# Altium PCB PCB_2020-12-12_22-15-00_2021-06-10.pcbdoc
Units mm, origin at the board's own origin, x right, y up, seen from the top; angles counter-clockwise.
Board outline 79.76 x 77.85 mm, 2 copper layers (Top Layer, Bottom Layer); 79 components, 46 nets, 216 pads, 113 vias.
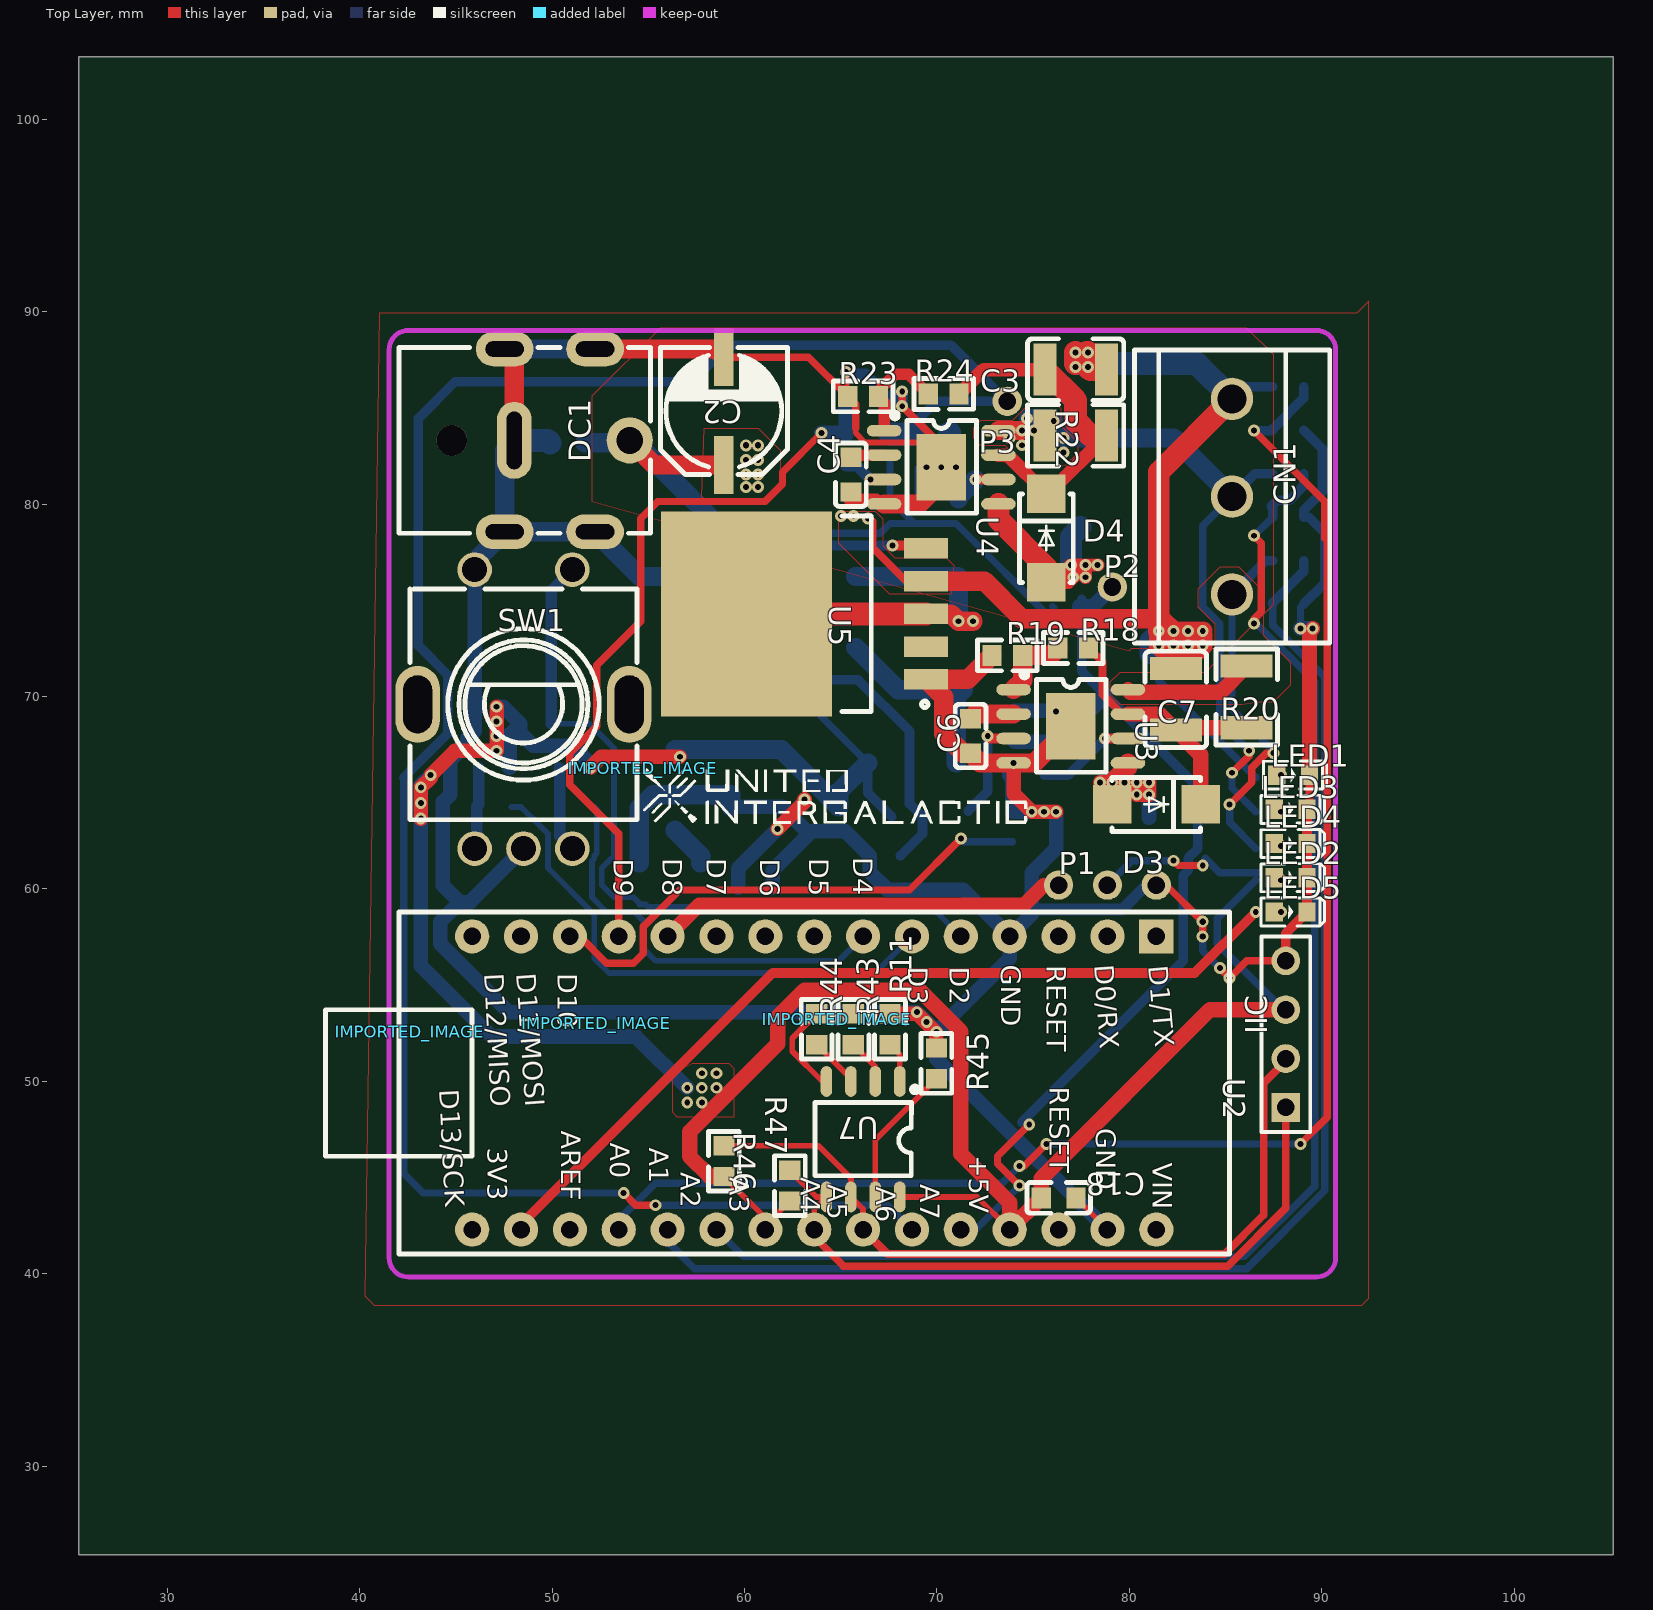
[diagram p0: Top Layer view]
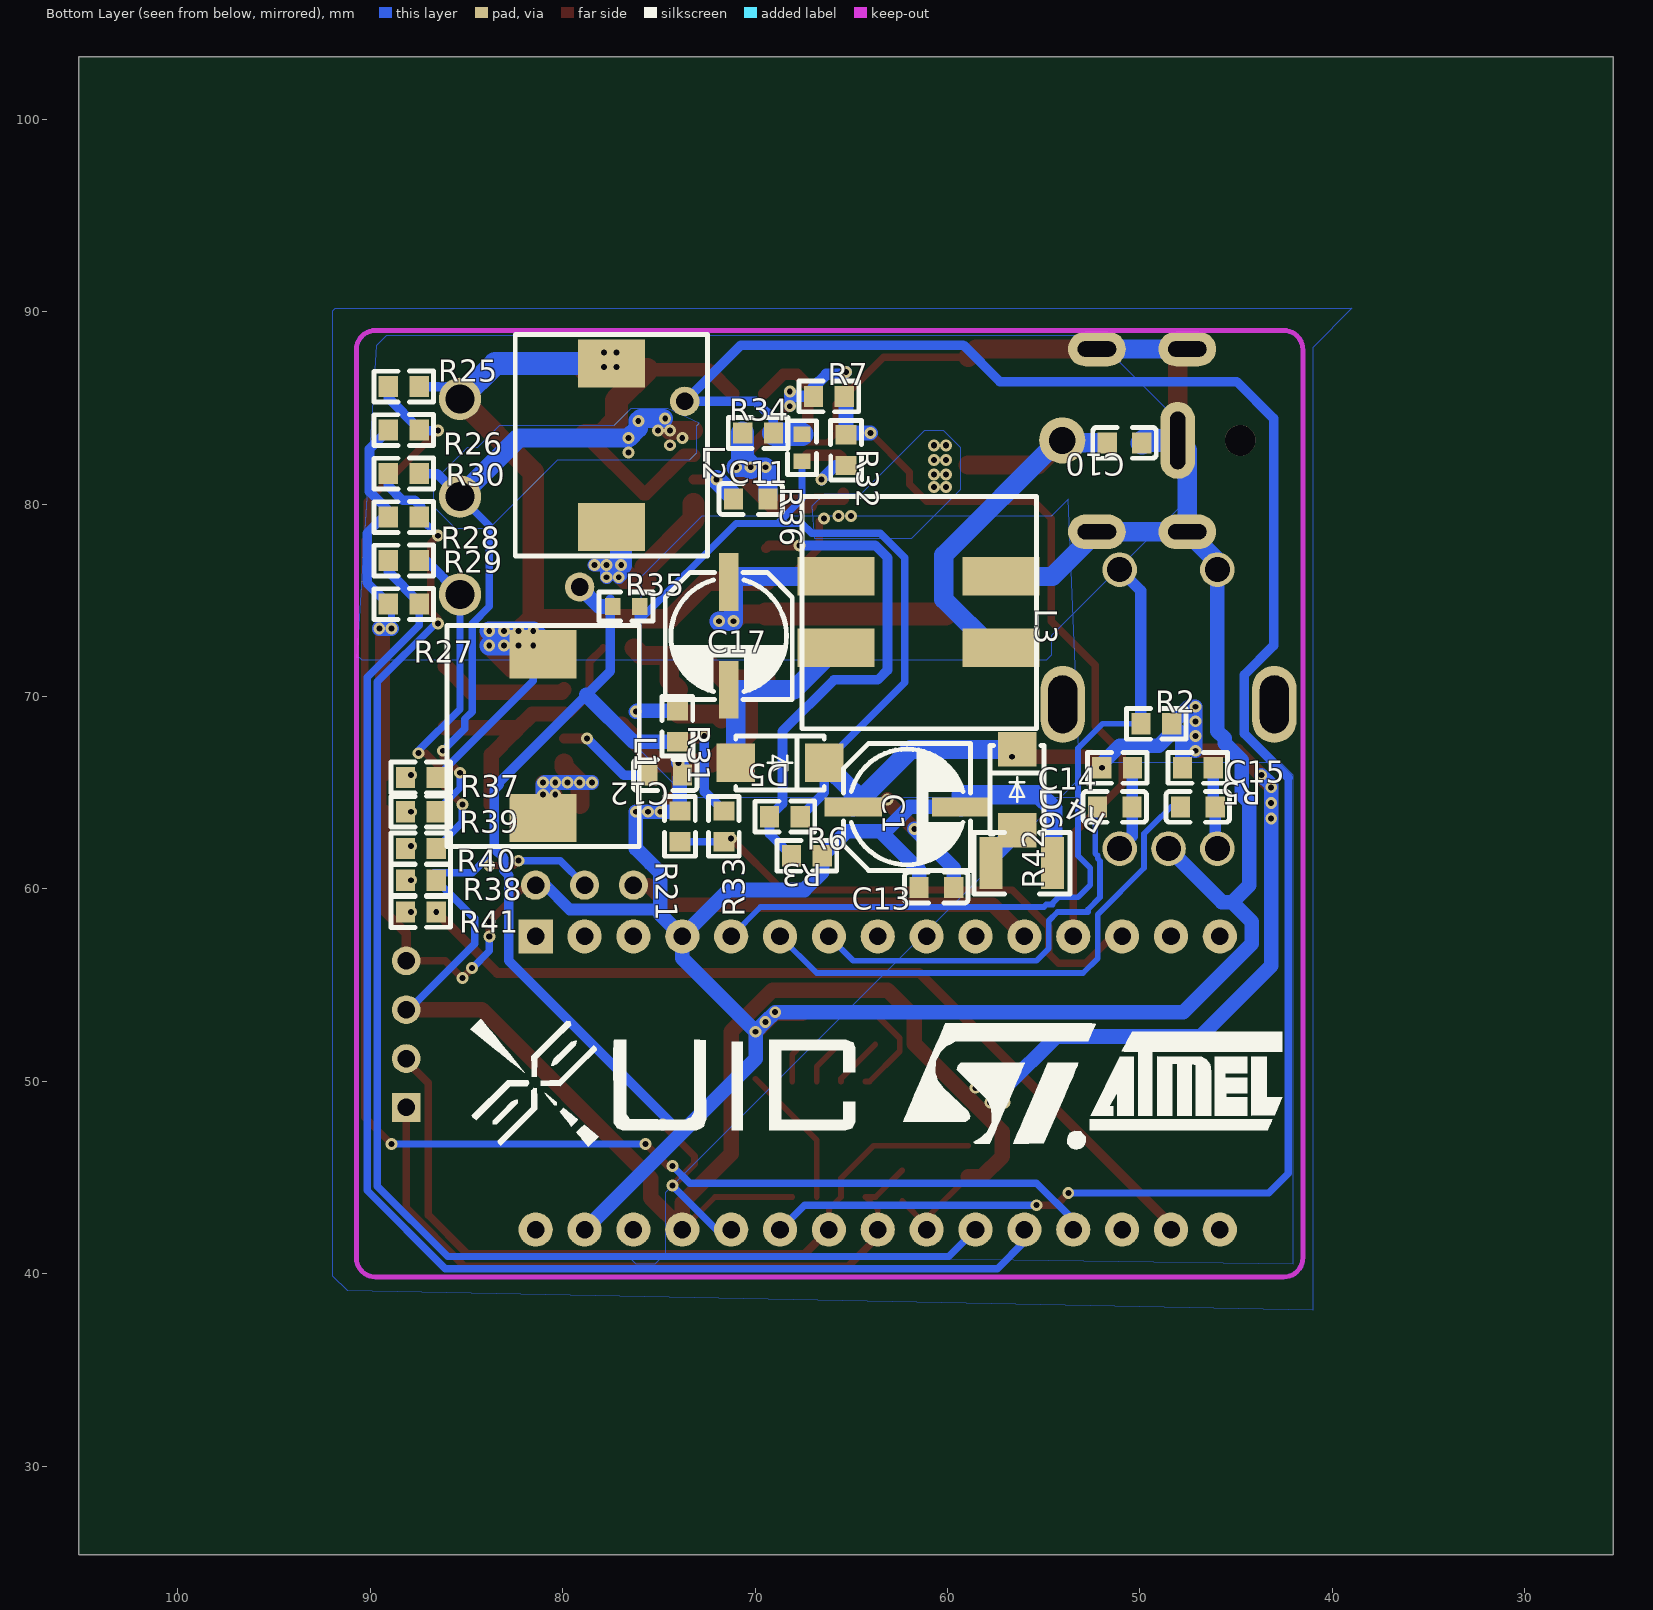
[diagram p1: Bottom Layer view, seen from below]

## Layer stack, top to bottom
Top Layer: signal copper (thickness not stored)
Dielectric: dielectric 0.32, FR-4, Dk 4.8
Bottom Layer: signal copper (thickness not stored)

## Board outline
105.156,25.4 25.4,25.4 25.4,103.251 105.156,103.251

## Components (designator, comment, footprint, x,y, rotation, side; value= is the part's Value field where it differs from the comment)
C1 "220uF" CAP-SMD_BD6.3-L6.6-W6.6-FD#1 62.103,64.262 r0 bottom
C2 "220uF" CAP-SMD_BD6.3-L6.6-W6.6-FD#2 58.928,84.836 r90 top
C3 "1uF" C1210 77.216,86.995 r0 top
C4 "1nF" C0603#1 65.532,81.534 r90 top
C6 "1nF" C0603#1 71.755,67.945 r90 top
C7 "1uF" C1210 82.423,69.85 r90 top
C10 "1uF" C0603#2 50.8,83.185 r180 bottom
C11 "1uF" C0603#2 70.231,80.264 r180 bottom
C12 "1uF" C0603#2 74.676,65.913 r180 bottom
C13 "1uF" C0603#2 60.579,60.071 r0 bottom
C14 "0.01uF" C0603#2 51.308,64.262 r0 bottom
C15 "0.01uF" C0603#2 46.99,64.262 r0 bottom
C17 "22uF" CAP-SMD_BD6.3-L6.6-W6.6-FD#1 71.374,73.152 r90 bottom
C18 "0.1u" C0603#1 76.327,43.942 r180 top
CN1 "MKDSN1.5/3-5.08" CONN-TH_3P-P5.08_1729131 85.344,80.391 r90 top
D3 "肖特基" DO-214AC_L4.3-W2.7-LS5.3-RD#1 81.407,64.389 r180 top
D4 "肖特基" DO-214AC_L4.3-W2.7-LS5.3-RD#1 75.692,78.232 r270 top
D5 "SS34_C8678" DO-214AC_L4.3-W2.7-LS5.3-RD#2 68.707,66.548 r180 bottom
D6 "1SMA4733A_C362278" SMA_L4.4-W2.8-LS5.4-RD 56.388,65.151 r90 bottom
DC1 "DC007B" DC-007B 42.037,83.312 r90 top
IIC "4p焊盘" HDR1X4 88.138,52.451 r90 top
IMPORTED_IMAGE "IMPORTED_IMAGE" IMPORTED_IMAGE 54.701,66.265 r0 top
IMPORTED_IMAGE "IMPORTED_IMAGE" IMPORTED_IMAGE 42.597,52.562 r0 top
IMPORTED_IMAGE "IMPORTED_IMAGE" IMPORTED_IMAGE 52.307,53.02 r0 top
IMPORTED_IMAGE "IMPORTED_IMAGE" IMPORTED_IMAGE 64.808,53.237 r0 top
L1 "47uH" IND-SMD_L11.5-W10.0 81.026,67.945 r90 bottom
L2 "47uH" IND-SMD_L11.5-W10.0 77.47,83.058 r90 bottom
L3 "MSD1278" MSD1278 67.564,80.391 r90 bottom
LED1 "LED-0603_B" LED0603_BLUE 88.519,65.913 r0 top
LED2 "LED-0603_B" LED0603_BLUE 88.392,60.579 r0 top
LED3 "LED-0603_B" LED0603_BLUE 88.392,64.135 r0 top
LED4 "LED-0603_B" LED0603_BLUE 88.392,62.357 r0 top
LED5 "LED-0603_B" LED0603_BLUE 88.392,58.801 r0 top
P1 "1PIN" 1P 76.327,60.071 r0 top
P2 "1PIN" 1P 79.121,75.565 r0 top
P3 "1PIN" 1P 73.66,85.217 r0 top
R2 "10k" R0603#1 49.149,68.58 r0 bottom
R3 "11k" R0603#1 67.31,61.722 r180 bottom
R4 "10k" R0603#1 51.181,66.294 r180 bottom
R5 "10k" R0603#1 46.99,66.294 r180 bottom
R6 "33k" R0603#1 68.453,63.754 r0 bottom
R7 "10K" R0603#1 66.167,85.598 r0 bottom
R11 "4.7K" R0603#2 67.564,52.705 r270 top
R18 "30k" R0603#2 77.089,72.517 r0 top
R19 "1k" R0603#2 73.66,72.136 r0 top
R20 "0.68R" R1210#1 86.106,69.977 r90 top
R21 "10K" R0603#1 73.914,63.246 r90 bottom
R22 "0.68R" R1210#1 77.216,83.566 r180 top
R23 "1k" R0603#2 66.167,85.598 r0 top
R24 "30k" R0603#2 70.358,85.725 r0 top
R25 "18k" R0603#1 88.265,86.106 r0 bottom
R26 "2k" R0603#1 88.265,83.845 r0 bottom
R27 "2k" R0603#1 88.265,74.803 r0 bottom
R28 "2k" R0603#1 88.265,79.324 r0 bottom
R29 "18k" R0603#1 88.265,77.064 r0 bottom
R30 "18k" R0603#1 88.265,81.585 r0 bottom
R31 "100k" R0603#1 74.041,68.453 r90 bottom
R32 "100R" R0603#1 65.278,82.804 r90 bottom
R33 "100R" R0603#1 71.628,63.246 r270 bottom
R34 "100k" R0603#1 69.85,83.693 r0 bottom
R35 "100KΩ" R0603#3 76.708,74.676 r0 bottom
R36 "100KΩ" R0603#3 67.564,82.931 r90 bottom
R37 "2.7k" R0603#1 87.376,65.786 r0 bottom
R38 "270R" R0603#1 87.376,60.452 r0 bottom
R39 "2.7k" R0603#1 87.376,64.008 r0 bottom
R40 "2.7k" R0603#1 87.376,62.103 r0 bottom
R41 "270R" R0603#1 87.376,58.801 r0 bottom
R42 "20" R1210#2 56.134,61.341 r180 bottom
R43 "4.7K" R0603#2 65.659,52.705 r270 top
R44 "4.7K" R0603#2 63.754,52.705 r270 top
R45 "4.7K" R0603#2 69.977,50.927 r90 top
R46 "4.7K" R0603#2 58.928,45.847 r270 top
R47 "4.7K" R0603#2 62.357,44.577 r270 top
SW1 "EC11" SW-TH_EC11E15244G1 48.514,69.342 r0 top
U2 "ARDUINO_NANO" ARDUINO_NANO 63.627,49.911 r270 top
U3 "BP1808" SOIC-8_L5.0-W4.0-P1.27-LS6.0-BL-EP 76.962,68.453 r270 top
U4 "BP1808" SOIC-8_L5.0-W4.0-P1.27-LS6.0-BL-EP 70.231,81.915 r270 top
U5 "XL6019E1" TO-263-5_L10.2-W9.9-P1.70-LS14.4-TL 64.77,74.295 r180 top
U7 "AT24C256M/TR" SOP-8_L4.9-W3.9-P1.27-LS6.0-BL 66.167,46.99 r180 top

## Footprints (in the part's own frame and the unit in brackets; to place one, negate y for a bottom-side part, rotate by r counter-clockwise, add the part's x,y. Pads: shape width x height; smd on the part's side, far side on the other; paste and mask are expansions set on the pad)
1P [mil]
  round 60 hole 36: 1(0,5)
ARDUINO_NANO [mil]
  rect 70x70 hole 36: 1(-300,700)
  round 70 hole 36: 2(-300,600) 3(-300,500) 4(-300,400) 5(-300,300) 6(-300,200) 7(-300,100) 8(-300,0) 9(-300,-100) 10(-300,-200) 11(-300,-300) 12(-300,-400) 13(-300,-500) 14(-300,-600) 15(-300,-700) 16(300,-700) 17(300,-600) 18(300,-500) 19(300,-400) 20(300,-300) 21(300,-200) 22(300,-100) 23(300,0) 24(300,100) 25(300,200) 26(300,300) 27(300,400) 28(300,500) 29(300,600) 30(300,700)
  silkscreen extent -350,-1000 350,850
C0603#1 [mm]
  rect 1x1.1 smd: 1(-0.9,0) 2(0.9,0)
  silkscreen extent -1.65,-0.8 1.65,0.8
C0603#2 [mm]
  rect 1x1.1 smd: 1(0.9,0) 2(-0.9,0)
  silkscreen extent -1.65,-0.8 1.65,0.8
C1210 [mm]
  rect 1.2x2.7 smd: 1(-1.6,0) 2(1.6,0)
  silkscreen extent -2.5,-1.6 2.5,1.6
CAP-SMD_BD6.3-L6.6-W6.6-FD#1 [mm]
  rect 3x1 smd: 1(2.8,0) 2(-2.8,0)
  silkscreen extent -3.3,-3.3 3.3,3.3
CAP-SMD_BD6.3-L6.6-W6.6-FD#2 [mm]
  rect 3x1 smd: 1(-2.8,0) 2(2.8,0)
  silkscreen extent -3.3,-3.3 3.3,3.3
CONN-TH_3P-P5.08_1729131 [mm]
  round 2.2 hole 1.5: 1(-5.08,0) 2(0,0) 3(5.08,0)
  silkscreen extent -7.62,-5.08 7.62,5.08
DC-007B [mm]
  round 2.4 hole 1.4: 1(0,-12)
  oval 1.8x3 hole 0.8 slot 2 at 90 deg: 2(-4.75,-5.5) 2(-4.75,-10.2) 2(4.75,-5.5) 2(4.75,-10.2)
  oval 4x1.8 hole 0.8 slot 3 at 0 deg: 2(0,-6)
  round 1.6 hole 1.6 unplated: ""(0,-2.75)
  silkscreen extent -4.83,-13.08 4.83,0
DO-214AC_L4.3-W2.7-LS5.3-RD#1 [mm]
  rect 2x2 smd: 1(-2.3,0) 2(2.3,0)
  silkscreen extent -2.3,-1.4 2.3,1.4
DO-214AC_L4.3-W2.7-LS5.3-RD#2 [mm]
  rect 2x2 smd: 1(2.3,0) 2(-2.3,0)
  silkscreen extent -2.3,-1.4 2.3,1.4
HDR1X4 [mil]
  rect 59x59 hole 36: 1(-150,0)
  round 59 hole 36: 2(-50,0) 3(50,0) 4(150,0)
  silkscreen extent -200,-50 200,50
IMPORTED_IMAGE [mm]
  silkscreen extent 0,-2.87 20,0
IND-SMD_L11.5-W10.0 [mm]
  rect 2.5x3.5 smd: 1(4.25,0) 2(-4.25,0)
  silkscreen extent -5.75,-5 5.75,5
LED0603_BLUE [mm]
  rect 0.9x1 smd: 1(-0.85,0) 2(0.85,0)
  silkscreen extent -1.54,-0.73 1.75,0.73
MSD1278 [mm]
  rect 2x4 smd: 1(-7.85,-10.35) 2(-4.15,-10.35) 3(-4.15,-1.775) 4(-7.85,-1.775)
  silkscreen extent -12.07,-12.19 0,0
R0603#1 [mm]
  rect 1x1.1 smd: 1(0.8,0) 2(-0.8,0)
  silkscreen extent -1.55,-0.81 1.55,0.8
R0603#2 [mm]
  rect 1x1.1 smd: 1(-0.8,0) 2(0.8,0)
  silkscreen extent -1.55,-0.8 1.55,0.81
R0603#3 [mm]
  rect 0.8x0.9 smd: 1(0.7,0) 2(-0.7,0)
  silkscreen extent -1.4,-0.76 1.4,0.75
R1210#1 [mm]
  rect 1.2x2.7 smd: 1(-1.6,0) 2(1.6,0)
  silkscreen extent -2.5,-1.6 2.5,1.6
R1210#2 [mm]
  rect 1.2x2.7 smd: 1(1.6,0) 2(-1.6,0)
  silkscreen extent -2.5,-1.6 2.5,1.6
SMA_L4.4-W2.8-LS5.4-RD [mm]
  rect 1.8x2 smd: 1(2.1,0) 2(-2.1,0)
  silkscreen extent -2.3,-1.4 2.3,1.4
SOIC-8_L5.0-W4.0-P1.27-LS6.0-BL-EP [mm]
  oval 0.6x1.8 smd: 1(-1.905,-2.972) 2(-0.635,-2.972) 3(0.635,-2.972) 4(1.905,-2.972) 5(1.905,2.972) 6(0.635,2.972) 7(-0.635,2.972) 8(-1.905,2.972)
  rect 3.45x2.56 smd: 9(0,0)
  silkscreen extent -2.84,-2.56 2.39,1.83
SOP-8_L4.9-W3.9-P1.27-LS6.0-BL [mm]
  oval 0.6x1.6 smd: 1(-1.905,-3) 2(-0.635,-3) 3(0.635,-3) 4(1.905,-3) 5(1.905,3) 6(0.635,3) 7(-0.635,3) 8(-1.905,3)
  silkscreen extent -2.84,-2.74 2.5,1.9
SW-TH_EC11E15244G1 [mm]
  oval 2.3x4 hole 1.5 slot 3 at 90 deg: 6(5.5,0.25) 7(-5.5,0.25)
  round 1.8 hole 1.3: A(-2.54,-7.25) B(2.54,-7.25) C(0,-7.25) D(-2.54,7.25) E(2.54,7.25)
  silkscreen extent -5.9,-5.75 5.9,6.25
TO-263-5_L10.2-W9.9-P1.70-LS14.4-TL [mil]
  rect 90x42.1 smd: 1(-183.77,134) 2(-183.77,67) 3(-183.77,0) 4(-183.77,-67) 5(-183.77,-134)
  rect 350x419.68 smd: 6(183.77,0)
  silkscreen extent -188,-200 -11,200

## Free pads (board coordinates)
  round 1.524 hole 0.914: 1(78.867,60.198) 2(81.407,60.198)

## Via types
v1: diameter 0.62, hole 0.305, Top Layer to Bottom Layer, 55 vias
v2: diameter 0.61, hole 0.305, Top Layer to Bottom Layer, 42 vias
v3: diameter 0.625, hole 0.318, Top Layer to Bottom Layer, 16 vias

## Nets (pads, with @x,y where several pads share a name; then routed paths per layer and width w, separated by ;. In a path a pad name is that pad's centre, name@x,y a point inside that pad or via, vN(x,y) a via of type N, cw(c..) or ccw(c..) an arc to the next point about the centre after c; other vN are vias at no path point)
+3.3V: R41.2 U2.17 | length 45.2
  Top Layer w0.5: U2.17 48.387,42.545 61.468,55.626 83.401,55.626 v1(86.576,58.801)
+5V: C1.1 C13.2 C18.2 D5.1 D6.1 IIC.3 pad.1 R2.2 R4.2 R5.2 R6.2 R35.2 R36.2 R38.2 R46.2 R47.2 U2.22 U2.27 U7.8 | length 190.4
  Top Layer w0.3: R46.2 61.087,42.888 U2.22 61.087,42.507 R47.2 ; U7.8 72.088,43.99 U2.27
  Top Layer w0.381: v2(82.296,61.468) 82.55,61.214 v2(83.82,61.214)
  Top Layer w0.762: v2(43.18,63.661) v2(43.18,65.278) 43.688,65.786 v2(43.688,65.913) 44.958,67.183 v2(47.117,67.183) v2(47.117,69.469) ; v1(51.981,66.294) 52.557,66.87 v1(56.642,66.87) ; v2(61.722,63.119) 63.119,64.516 v2(63.119,64.643)
  Top Layer w0.8: R46.2 58.204,45.047 57.15,46.101 57.15,47.371 61.722,51.943 61.722,53.34 63.119,54.737 69.088,54.737 71.247,52.578 71.247,46.228 73.787,43.688 U2.27 73.787,42.302 C18.2 75.427,44.947 84.201,53.721 IIC.3
  Bottom Layer w0.381: D5.1 62.23,70.725 62.23,77.216 63.5,78.486 67.056,78.486 67.564,78.994 68.834,78.994 ; R36.2 67.564,80.264 68.834,78.994 ; R35.2 76.073,74.611 76.073,73.914 70.993,78.994 68.834,78.994 ; pad.1 80.137,61.468 v2(82.296,61.468) ; 83.947,61.595 84.709,60.833 R38.2@86.703,60.833
  Bottom Layer w0.4: R38.2 84.582,58.458 84.582,57.15 88.011,53.721 IIC.3
  Bottom Layer w0.5: D5.1 66.407,65 R6.2
  Bottom Layer w0.762: v2(43.688,65.913) 43.18,65.405 v2(43.18,65.278) v2(43.18,64.461) v2(43.18,63.661) 43.18,56.007 46.863,52.324 54.356,52.324 v2(57.023,49.657) ; v2(47.117,67.183) v2(47.117,69.469) 47.46,69.469 R2.2 ; R5.2 47.79,68.021 R2.2 ; v1(51.981,66.294) 51.981,66.51 51.054,67.437 49.022,67.437 48.349,68.11 R2.2 ; C13.2 59.679,61.076 v2(61.722,63.119)
  Bottom Layer w1: D6.1 61.914,67.251 C1.1 64.903,65.044 D5.1
  other v2: 57.023,48.895 57.785,48.895 57.785,49.657 58.547,49.657 57.785,50.419 58.547,50.419 47.117,67.945 47.117,68.707
C4_2: C4.2 U4.2 | length 1.8
  Top Layer w0.6: C4.2 65.648,82.55 U4.2
D2: R2.1 SW1.E U2.5 | length 39.5
  Bottom Layer w0.3: R2.1 51.943,68.58 53.213,67.31 53.213,61.722 52.578,61.087 52.578,60.198 53.213,59.563 54.232,59.56 54.529,59.263 54.529,59.182 ; 54.528,59.182 54.864,59.182 54.991,59.055 69.723,59.055 U2.5
  Bottom Layer w0.6: R2.1 49.949,75.487 SW1.E
D3: C15.1 U2.6 | length 27.7
  Bottom Layer w0.3: C15.1 48.387,64.262 49.276,63.373 ; 49.2,63.449 49.784,62.865 49.784,61.087 52.197,58.674 52.197,56.388 52.959,55.626 66.802,55.626 U2.6
D4: C14.1 U2.7 | length 21.8
  Bottom Layer w0.3: C14.1 52.324,64.145 52.324,61.844 52.197,61.717 52.197,61.575 52.07,61.448 52.07,59.563 52.705,58.928 52.705,58.801 54.282,58.801 54.737,58.346 54.737,56.896 55.372,56.261 64.897,56.261 U2.7
D4_1: C3.1 D4.1 R22.1 R24.2 U4.7 | length 17.9
  Top Layer w0.7: R24.2 72.428,86.995 C3.1 ; U4.7 73.674,82.55 D4.1 75.782,80.532 R22.1
  Top Layer w1.2: C3.1 77.216,85.395 77.216,84.328 77.978,83.566 R22.1
D5_2: C17.2 D5.2 L3.4 | length 10.4
  Bottom Layer w1: L3.4 67.978,70.352 C17.2 71.007,69.985 D5.2
D6_2: D6.2 R42.2 | length 2.3
  Bottom Layer w1: D6.2 57.734,61.705 R42.2
D8: P1.1 U2.11 | length 21.4
  Top Layer w0.762: U2.11 57.658,59.182 74.549,59.182 75.565,60.198 P1.1
GND: C1.2 C2.2 C4.1 C6.1 C10.1 C11.1 C12.1 C13.1 C18.1 DC1.2 IIC.4 L3.2 LED1.2 LED2.2 LED3.2 LED4.2 LED5.2 pad.2 R3.1 R7.1 R11.1 R19.1 R21.1 R23.1 R26.1 R27.1 R28.1 R31.1 R34.1 R42.1 R43.1 R44.1 R45.2 SW1.C SW1.D U2.4 U2.29 U3.4 U3.9 U4.4 U4.9 U5.1 U7.4 | length 278
  Top Layer w0.3: U7.4 64.056,49.99 62.484,51.562 62.484,52.235 R44.1 R43.1 R11.1 ; 65.786,83.947 65.786,83.693 66.271,83.208 69.7,83.208 v1(70.993,81.915) ; R11.1@67.722,53.505 67.811,53.594 v2(68.961,53.594) ; C18.1 78.867,42.302 U2.29
  Top Layer w0.381: C2.2 63.329,87.636 R23.1 65.278,85.687 v3(65.278,86.868) ; v1(68.199,85.852) v1(68.199,85.09) 70.231,83.058 v1(70.231,81.915) ; pad.2 81.915,60.198 v3(83.82,58.293) v3(83.82,57.531) ; v3(84.709,55.88) v3(85.217,55.372) 86.106,56.261 IIC.4 ; v2(88.9,73.533) v2(89.535,73.533)
  Top Layer w0.4: R23.1 65.786,85.179 65.786,83.947 ; LED3.2 89.369,64.262 LED1.2
  Top Layer w0.5: IIC.4 88.138,57.697 LED5.2 LED4.2 LED3.2
  Top Layer w0.6: C4.1@65.43,80.576 65.43,80.264 66.845,80.264 U4.4@67.158,79.952
  Top Layer w0.762: R11.1 68.924,53.505 68.961,53.542 69.977,52.526 R45.2 ; v2(73.99,66.548) 73.99,64.948 v2(74.93,64.008) v2(76.2,64.008) ; LED1.2 89.369,73.367 v2(89.535,73.533)
  Top Layer w1: DC1.2@47.537,88.062 48.037,87.562 DC1.2@48.037,83.312 ; DC1.2@52.237,88.062 58.502,88.062 C2.2 ; U4.4 69.088,80.01 v1(70.993,81.915) ; R19.1 71.615,70.891 U5.1 70.358,69.971 70.358,68.072 71.385,67.045 C6.1 72.252,66.548 v2(73.99,66.548) 75.057,66.548 U3.9
  Bottom Layer w0.381: v3(83.82,57.531) 83.82,56.769 v3(84.709,55.88) ; v2(88.9,73.533) 88.9,74.638 R27.1
  Bottom Layer w0.5: R27.1 90.17,75.908 90.17,78.486 89.332,79.324 R28.1 89.065,79.667 90.043,80.645 90.043,82.867 R26.1
  Bottom Layer w0.6: v3(65.278,86.868) 65.405,86.741 66.294,86.741 66.967,86.068 R7.1 67.945,85.598 v1(68.199,85.852) v1(68.199,85.09) ; U2.4 75.184,58.928 79.629,58.928 80.899,60.198 pad.2
  Bottom Layer w0.762: SW1.D 45.974,68.199 45.593,67.818 45.593,67.564 44.704,66.675 44.704,64.897 44.323,64.516 44.323,60.198 45.212,59.309 ; SW1.C 45.731,59.309 45.212,59.309 ; C1.2 61.976,64.262 63.246,62.992 65.24,62.992 R3.1 66.51,60.871 67.437,59.944 71.374,59.944 U2.4 ; C13.1 61.479,60.971 63.373,62.865 ; v2(73.99,66.548) 73.776,66.334 C12.1 73.914,65.775 R21.1 73.952,64.008 v2(76.2,64.008) 76.2,62.103 75.438,61.341 74.93,60.833 74.93,58.674 U2.4 ; R31.1 76.162,69.253 v2(76.2,69.215) ; U2.29 69.977,51.181 v2(69.977,52.578) ; v2(88.9,73.533) v2(89.535,73.533) ; 45.212,59.309 44.196,58.293 44.196,57.15 47.752,53.594 v2(68.961,53.594) v2(69.469,53.086) v2(69.977,52.578) ; v2(69.977,52.578) 73.787,56.388 U2.4
  Bottom Layer w1: SW1.D 45.974,76.999 DC1.2@47.537,78.562 ; DC1.2@47.537,88.062 DC1.2@52.237,88.062 ; DC1.2@48.037,83.312 47.537,82.812 DC1.2@47.537,78.562 ; R42.1 54.534,64.186 55.245,64.897 59.303,64.897 C1.2 ; L3.2 54.558,76.241 52.237,78.562 DC1.2@47.537,78.562 ; C11.1 69.331,81.777 v1(69.469,81.915) v1(70.231,81.915) v1(70.993,81.915)
  Bottom Layer w1.2: DC1.2@48.037,83.312 49.773,83.312 C10.1 ; v1(70.231,81.915) 70.65,82.334 R34.1
  other v2: 75.565,64.008
L2_2: D4.2 L2.2 U4.5 | length 23.3
  Top Layer w0.7: D4.2@75.692,75.932 76.821,75.932 ; D4.2@75.692,75.932 76.821,75.932 ; D4.2@75.692,75.932 76.059,75.932 v1(76.962,76.835) ; 76.821,75.932 v1(77.089,76.2) ; 76.821,75.932 v1(77.089,76.2) ; v1(76.962,76.835) v1(77.724,76.835) ; v1(76.962,76.835) 76.962,76.327 v1(77.089,76.2) ; v1(77.089,76.2) v1(77.724,76.835) ; v1(77.089,76.2) v1(77.724,76.835) ; v1(77.724,76.835) v1(77.724,76.2) v1(77.724,76.835) ; v1(77.724,76.835) v1(78.359,76.835) ; v1(77.724,76.835) v1(78.359,76.835) ; v1(77.724,76.835) v1(78.359,76.835)
  Top Layer w1.143: U4.5 73.203,79.197 75.692,76.708 D4.2@75.692,75.933
  Bottom Layer w0.7: v1(77.724,76.835) v1(76.962,76.835) 76.962,76.327 v1(77.089,76.2) v1(77.724,76.835) ; v1(77.724,76.835) v1(77.724,76.2) v1(77.724,76.835) ; v1(77.724,76.835) v1(78.359,76.835) v1(77.724,76.835)
  Bottom Layer w1.143: v1(76.962,76.835) 76.962,78.3 L2.2
LED1_1: LED1.1 R37.1
  other v1: 87.884,65.913
LED2_1: LED2.1 R38.1
  other v1: 87.884,60.452
LED3_1: LED3.1 R39.1
  other v1: 87.884,64.008
LED4_1: LED4.1 R40.1
  other v1: 87.884,62.23
LED5_1: LED5.1 R41.1
  other v1: 87.884,58.801
OC1: CN1.2 R22.2 R30.2 R39.2 U4.8 | length 35.2
  Top Layer w0.381: v2(85.344,66.04) 86.233,66.929 v2(86.233,67.183)
  Top Layer w1: U4.8 v1(74.422,83.82)
  Bottom Layer w0.381: v2(85.344,66.04) 85.344,65.24 R39.2 ; CN1.2 83.82,78.867 83.82,74.676 84.709,73.787 84.709,69.215 85.09,68.834 85.09,68.326 v2(86.233,67.183)
  Bottom Layer w0.5: CN1.2 86.538,81.585 R30.2
  Bottom Layer w1: v1@74.762,84.455 75.946,84.455 v1(76.073,84.328) 76.073,83.947 v1(76.581,83.439) 82.296,83.439 CN1.2
  other v1: 76.581,82.677 74.422,83.058 73.787,83.439 75.057,83.82 74.676,84.455
OC2: CN1.1 R20.2 R29.2 R40.2 U3.8 | length 25.5
  Top Layer w0.381: v2(85.217,64.389) 86.36,65.532 86.36,66.294 87.122,67.056 v2(87.503,67.056)
  Top Layer w0.8: U3.8 80.061,70.231 84.76,70.231 R20.2
  Bottom Layer w0.381: v2(85.217,64.389) 85.217,63.462 R40.2 ; CN1.1 85.344,69.342 87.503,67.183 v2(87.503,67.056)
  Bottom Layer w0.5: CN1.1 87.097,77.064 R29.2
PWM1: R7.2 R32.1 U2.12 | length 39.2
  Top Layer w0.381: U2.12 53.467,62.865 50.927,65.405 50.927,67.056 52.324,68.453 52.324,71.628 54.61,73.914 54.61,79.248 55.499,80.137 61.087,80.137 61.976,81.026 61.976,81.661 v1(64.008,83.693)
  Bottom Layer w0.762: v1(64.008,83.693) 65.189,83.693 R32.1 65.278,85.509 R7.2
PWM2: R21.2 R33.1 U2.13 | length 27.1
  Top Layer w0.381: U2.13 51.435,57.531 52.832,56.134 54.229,56.134 54.737,56.642 54.737,58.039 56.642,59.944 68.58,59.944 v1(71.247,62.611)
  Bottom Layer w0.381: v1(71.247,62.611) 71.412,62.446 R33.1 R21.2
R23_2: R23.2 R24.1 U4.1 | length 5.6
  Top Layer w0.6: U4.1 67.259,85.306 R23.2 66.967,85.89 67.818,86.741 68.542,86.741 R24.1
SCL: IIC.2 R46.1 U2.24 U7.6 | length 41
  Top Layer w0.3: R46.1 63.843,46.647 65.532,44.958 U7.6 66.167,43.355 U2.24
  Top Layer w0.4: U2.24 67.437,41.021 84.963,41.021 86.995,43.053 86.995,49.911 88.138,51.054 IIC.2
SDA: IIC.1 R47.1 U2.23 U7.5 | length 36.4
  Top Layer w0.3: R47.1 63.744,43.99 U7.5 63.627,43.355 U2.23
  Top Layer w0.4: U2.23 63.627,41.91 65.151,40.386 85.11,40.386 ; 85.111,40.386 88.138,43.413 IIC.1
SW1_A: C15.2 R5.1 SW1.A | length 4.3
  Bottom Layer w0.6: SW1.A 46.09,62.208 C15.2 46.19,64.362 R5.1
SW1_B: C14.2 R4.1 SW1.B | length 4.5
  Bottom Layer w0.6: R4.1 50.408,66.267 C14.2 50.408,62.738 SW1.B
TMP1: P3.1 R34.2 R36.1 U2.25 | length 109.1
  Top Layer w0.381: v2(53.721,44.196) 54.356,43.561 v2(55.372,43.561)
  Bottom Layer w0.381: 42.291,65.786 42.291,45.204 43.299,44.196 v2(53.721,44.196) ; v2(55.372,43.561) 67.437,43.561 U2.25
  Bottom Layer w0.5: 42.291,65.786 44.577,68.072 44.577,71.12 43.053,72.644 43.053,84.455 44.958,86.36 57.277,86.36 59.182,88.265 70.739,88.265 P3.1 69.977,85.344 69.85,85.217 69.05,84.417 R34.2
  Bottom Layer w1.2: R36.1 68.988,83.631 R34.2
TMP2: P2.1 R31.2 R35.1 U2.26 | length 49.7
  Top Layer w0.381: v1(74.295,44.577) 73.152,45.72 73.152,46.101 v1(74.803,47.752)
  Bottom Layer w0.381: U2.26 72.009,42.291 v1(74.295,44.577)
  Bottom Layer w0.5: 74.422,47.879 82.804,56.261 82.804,60.706 83.058,60.96 83.058,61.595 83.566,62.103 83.566,65.151 83.312,65.405 83.312,65.532 77.536,71.308 R35.1@77.536,75.057
  Bottom Layer w0.762: R31.2 76.342,67.653 78.776,70.079 ; R35.1 78.105,74.676 P2.1
U2_19: R25.1 R26.2 U2.19 | length 80.8
  Top Layer w0.381: v1(74.295,45.593) 74.549,45.593 v1(75.692,46.736) ; v1(86.487,83.82) 90.17,80.137 90.17,78.232 90.297,78.105 90.297,48.133 v1(88.9,46.736)
  Bottom Layer w0.381: U2.19 53.467,42.799 55.372,44.704 73.406,44.704 v1(74.295,45.593) ; v1(75.692,46.736) v1(88.9,46.736)
  Bottom Layer w0.5: v1(86.487,83.82) 87.376,83.82 R26.2@87.465,83.909 ; R26.2 R26.2@87.465,83.909 ; R25.1 89.065,85.509 R26.2@87.465,83.909
U2_20: R27.2 R29.1 U2.20 | length 71.6
  Bottom Layer w0.381: U2.20 56.007,41.656 57.404,40.259 86.106,40.259 90.17,44.323 90.17,70.993 87.465,73.698 R27.2
  Bottom Layer w0.5: R27.2 87.465,74.892 89.065,76.492 R29.1
U2_21: R28.2 R30.1 U2.21 | length 73.4
  Top Layer w0.381: v1(86.487,73.787) 86.487,74.041 86.868,74.422 86.868,77.978 v1(86.487,78.359)
  Bottom Layer w0.381: U2.21 59.944,40.894 85.979,40.894 89.637,44.552 89.637,70.764 86.614,73.787 v1(86.487,73.787) ; v1(86.487,78.359) R28.2
  Bottom Layer w0.5: R28.2 87.465,79.794 87.376,79.883 87.691,80.198 88.326,80.198 89.065,80.937 R30.1
U3_1: R18.1 R19.2 U3.1 | length 4
  Top Layer w1: U3.1 74.46,70.828 R19.2 75.908,72.136 R18.1
U3_2: C6.2 U3.2 | length 2.3
  Top Layer w1: C6.2 71.998,69.088 U3.2
U3_3: R33.2 U3.3 | length 5.7
  Top Layer w0.5: v1(72.644,67.945) 72.771,67.818 U3.3
  Bottom Layer w0.5: R33.2 72.644,65.062 v1(72.644,67.945)
U3_5: D3.2 L1.2 U3.5 | length 11.3
  Top Layer w0.762: v2(79.121,65.532) v2(78.486,65.532) v2(81.026,65.532) v2(81.026,64.897) v2(80.391,64.897)
  Top Layer w1: D3.2@79.107,64.389 79.107,65.518 v2(79.121,65.532) 79.934,66.345 U3.5
  Bottom Layer w0.762: v2(78.486,65.532) 80.932,65.532 81.026,65.438 L1.2
  other v2: 79.756,65.532 80.391,65.532
U3_6: C12.2 U3.6 | length 5.1
  Top Layer w0.5: v1@78.796,67.818 U3.6
  Bottom Layer w0.5: C12.2 76.835,65.913 v1(78.74,67.818)
U3_7: C7.1 D3.1 R18.2 R20.1 U3.7 | length 15.2
  Top Layer w0.4: R18.2 78.613,71.793 78.613,70.104 79.629,69.088 U3.7
  Top Layer w0.8: U3.7 81.585,69.088 C7.1 82.55,68.377 R20.1 ; C7.1@82.55,68.123 83.707,66.966 D3.1
U4_3: R32.2 U4.3 | length 1.6
  Bottom Layer w0.6: R32.2 65.824,82.004 v1(66.548,81.28)
U4_6: C11.2 U4.6 | length 2.6
  Top Layer w0.5: v1(72.009,81.28) U4.6
  Bottom Layer w1: C11.2 71.131,80.402 v1(72.009,81.28)
U5_3: C17.1 L3.3 U5.3 U5.6 | length 20.5
  Top Layer w1: U5.3 70.739,74.295 v1(71.12,73.914) v1(71.882,73.914)
  Top Layer w1.2: U5.6 U5.3
  Bottom Layer w1: L3.3 71.085,76.241 C17.1 71.12,75.698 v1(71.12,73.914) v1(71.882,73.914)
U5_5: R3.2 R6.1 U5.5 | length 26.5
  Top Layer w0.5: v1(67.691,77.851) 69.285,77.851 U5.5
  Bottom Layer w0.5: v1(67.691,77.851) 63.754,77.851 63.119,77.216 63.119,71.374 63.627,70.866 65.913,70.866 68.58,68.199 68.58,64.427 R6.1 69.253,62.865 R3.2
U7_1: R11.2 U7.1 | length 2.1
  Top Layer w0.3: R11.2 68.072,51.397 U7.1
U7_2: R43.2 U7.2 | length 2.4
  Top Layer w0.3: R43.2 66.802,50.762 U7.2
U7_3: R44.2 U7.3 | length 2.7
  Top Layer w0.3: R44.2 65.532,50.127 U7.3
U7_7: R45.1 U7.7 | length 7.5
  Top Layer w0.3: U7.7 66.802,46.952 R45.1
VIN: C2.1 C3.2 C7.2 C10.2 CN1.3 DC1.1 L1.1 L2.1 L3.1 R25.2 R37.2 U5.4 | length 95.2
  Top Layer w0.381: v3@66.675,79.121 66.675,77.724 68.402,75.997 U5.4
  Top Layer w1: DC1.1 55.313,82.036 C2.1 ; v1(82.296,72.644) 82.423,72.517 C7.2 ; v1(83.058,72.644) 82.423,72.009 C7.2 ; C7.2 82.423,71.755 v1(81.534,72.644) v1(81.534,73.406) v1(83.82,73.406) v1(83.82,72.644) 82.626,71.45 C7.2
  Top Layer w1.016: U5.4 72.466,75.997 74.422,74.041 81.661,74.041 v1(82.296,73.406)
  Top Layer w1.143: v1(81.534,73.406) 81.534,81.661 CN1.3
  Top Layer w1.2: v1(77.216,87.884) 77.216,87.309 77.791,87.884 v1(77.851,87.884) ; v1(77.851,87.122) 77.978,86.995 C3.2
  Bottom Layer w0.4: v1(81.534,73.406) 81.534,70.828 R37.2
  Bottom Layer w0.5: CN1.3 85.979,86.106 R25.2
  Bottom Layer w1: C10.2 54.102,83.185 DC1.1@54.229,83.312 ; DC1.1 DC1.1@54.229,83.312 ; L3.1 57.682,72.541 60.198,75.057 60.198,77.343 DC1.1@54.229,83.312 ; v1(83.82,72.644) v1(83.058,72.644) v1(81.534,72.644) 81.085,72.195 L1.1 81.026,72.898 v1(81.534,73.406) v1(83.058,73.406) v1(83.82,73.406)
  Bottom Layer w1.2: L2.1 83.507,87.308 CN1.3
  other v1: 77.216,87.122
  other v3: 66.421,79.248 65.024,79.375 65.659,79.375 60.071,80.899 60.706,80.899 60.071,81.534 60.706,81.534 60.071,82.296 60.706,82.296 60.071,83.058 60.706,83.058
pads on no net: DC1. SW1.6 SW1.7 U2.1 U2.2 U2.3 U2.8 U2.9 U2.10 U2.14 U2.15 U2.16 U2.18 U2.28 U2.30 U5.2

## Polygon pours and split planes (outlines as drawn)
GND on Top Layer (solid): 40.259,38.862 40.767,38.354 92.075,38.354 92.456,38.735 92.456,90.551 91.821,89.916 41.021,89.916
VIN on Top Layer (solid): 80.01,72.39 80.137,72.517 85.217,72.517 87.503,74.803 87.503,87.757 86.106,89.154 55.626,89.154 52.07,85.598 52.07,80.137
+5V on Top Layer (solid): 57.277,50.927 59.182,50.927 59.436,50.673 59.436,48.133 56.515,48.133 56.261,48.387 56.261,50.419
OC1 on Top Layer (solid): 76.708,82.042 77.343,82.677 77.343,83.185 76.454,84.074 76.454,84.963 76.2,85.217 74.803,85.217 73.914,84.328 72.263,84.328 71.882,83.947 71.882,83.439 72.263,83.058 73.533,83.058 74.676,81.915 75.057,81.915
OC2 on Top Layer (solid): 86.741,69.723 87.503,69.723 88.392,70.612 88.392,71.755 86.995,73.152 86.995,75.438 85.725,76.708 84.709,76.708 83.566,75.565 83.566,74.676 84.455,73.787 84.455,71.755 83.947,71.247 79.502,71.247 78.994,70.739 78.994,70.104 79.502,69.596 85.852,69.596
VIN on Top Layer (solid): 70.739,75.311 67.564,75.311 64.897,77.978 64.897,79.629 66.802,79.629 67.183,79.248 67.183,77.851 67.818,77.216 70.485,77.216 70.866,76.835
VIN on Top Layer (solid): 57.912,83.947 60.706,83.947 61.849,82.804 61.849,81.153 60.96,80.264 57.912,80.264 57.785,80.391
GND on Bottom Layer (solid): 91.186,39.116 91.948,39.878 91.948,90.043 91.821,90.17 38.989,90.17 41.021,88.138 41.021,38.1
VIN on Bottom Layer (solid): 89.662,88.265 89.154,88.773 52.451,88.773 47.752,84.074 47.752,80.01 54.61,73.152 54.61,72.136 54.864,71.882 90.424,71.882 90.551,72.009 90.678,72.009
+5V on Bottom Layer (solid): 53.086,64.77 53.721,80.264 54.61,79.375 72.771,79.375 75.946,76.2 75.946,67.183 75.946,67.056 75.946,67.183 73.533,64.77 53.086,64.77
+5V on Bottom Layer (solid): 42.037,40.513 42.037,65.913 42.672,66.548 52.324,66.548 74.676,44.196 74.676,41.021 74.705,40.992 76.708,41.021 76.2,40.513 75.184,40.513 74.705,40.992 42.037,40.513
OC1 on Bottom Layer (solid): 74.549,84.963 76.454,84.963 77.343,84.074 83.312,84.074 84.455,82.931 84.963,82.931 86.741,81.153 86.741,79.883 85.598,78.74 83.82,78.74 80.264,82.296 73.406,82.296 73.025,82.677 73.025,84.074 72.898,84.201
VIN on Bottom Layer (solid): 66.929,78.232 61.849,78.232 59.309,80.772 59.309,82.931 60.198,83.82 61.214,83.82 62.23,82.804 64.516,80.518 66.421,80.518 67.056,79.883

## Keep-outs
Keep-Out Layer:
  lines w0.254: 41.529,40.827 ccw(c42.529,40.827) 42.529,39.827 ; 41.529,88.027 cw(c42.529,88.027) 42.529,89.027 ; 89.729,39.827 ccw(c89.729,40.827) 90.729,40.827 ; 89.729,89.027 cw(c89.729,88.027) 90.729,88.027

## Silkscreen, mask and mechanical layers (free items; w line width, h text height)
Bottom Solder:
  rectangle: 88.773,87.63 90.043,88.392
Document:
  lines w0.003: 65.253,64.3 65.303,64.351

## Text inside footprints (layer, text, board x,y; h text height)
U2: Top Overlay "D1/TX" at 80.982,55.988 h1.02 r275; Top Overlay "GND" at 78.29,47.556 h1.02 r270; Top Overlay "+5V" at 71.686,46.159 h1.02 r270; Top Overlay "D12/MISO" at 46.483,55.599 h1.02 r273; Top Overlay "VIN" at 81.211,45.778 h1.02 r270; Top Overlay "D13/SCK" at 44.128,49.562 h1.02 r273; Top Overlay "GND" at 73.337,56.058 h1.02 r270; Top Overlay "D0/RX" at 78.188,56.03 h1.02 r274; Top Overlay "RESET" at 75.705,56.043 h1.02 r270; Top Overlay "D2" at 70.67,55.949 h1.02 r270; Top Overlay "D3" at 68.511,55.949 h1.02 r270; Top Overlay "D4" at 65.659,61.651 h1.02 r270; Top Overlay "D5" at 63.373,61.605 h1.02 r270; Top Overlay "D6" at 60.833,61.559 h1.02 r270; Top Overlay "D7" at 58.039,61.605 h1.02 r270; Top Overlay "D8" at 55.753,61.605 h1.02 r270; Top Overlay "D9" at 53.213,61.559 h1.02 r270; Top Overlay "D10" at 50.292,55.626 h1.02 r270; Top Overlay "D11/MOSI" at 48.134,55.591 h1.02 r274; Top Overlay "3V3" at 46.667,46.54 h1.02 r270; Top Overlay "AREF" at 50.477,47.429 h1.02 r270; Top Overlay "A0" at 53.017,46.794 h1.02 r270; Top Overlay "A1" at 55.049,46.54 h1.02 r270; Top Overlay "A2" at 56.7,45.27 h1.02 r270; Top Overlay "A3" at 59.24,45.016 h1.02 r270; Top Overlay "A4" at 62.923,45.016 h1.02 r270; Top Overlay "A5" at 64.32,44.635 h1.02 r270; Top Overlay "A6" at 66.86,44.508 h1.02 r270; Top Overlay "A7" at 69.146,44.635 h1.02 r270; Top Overlay "RESET" at 75.877,49.715 h1.02 r270